# Altium PCB PCB1.PcbDoc
Units mil, origin at the board's own origin, x right, y up, seen from the top; angles counter-clockwise.
Board outline 8212 x 7884 mil, 2 copper layers (Top Layer, Bottom Layer); 18 components, 44 nets, 114 pads, 0 vias.
Unrouted connection lines stored in the file: 10.
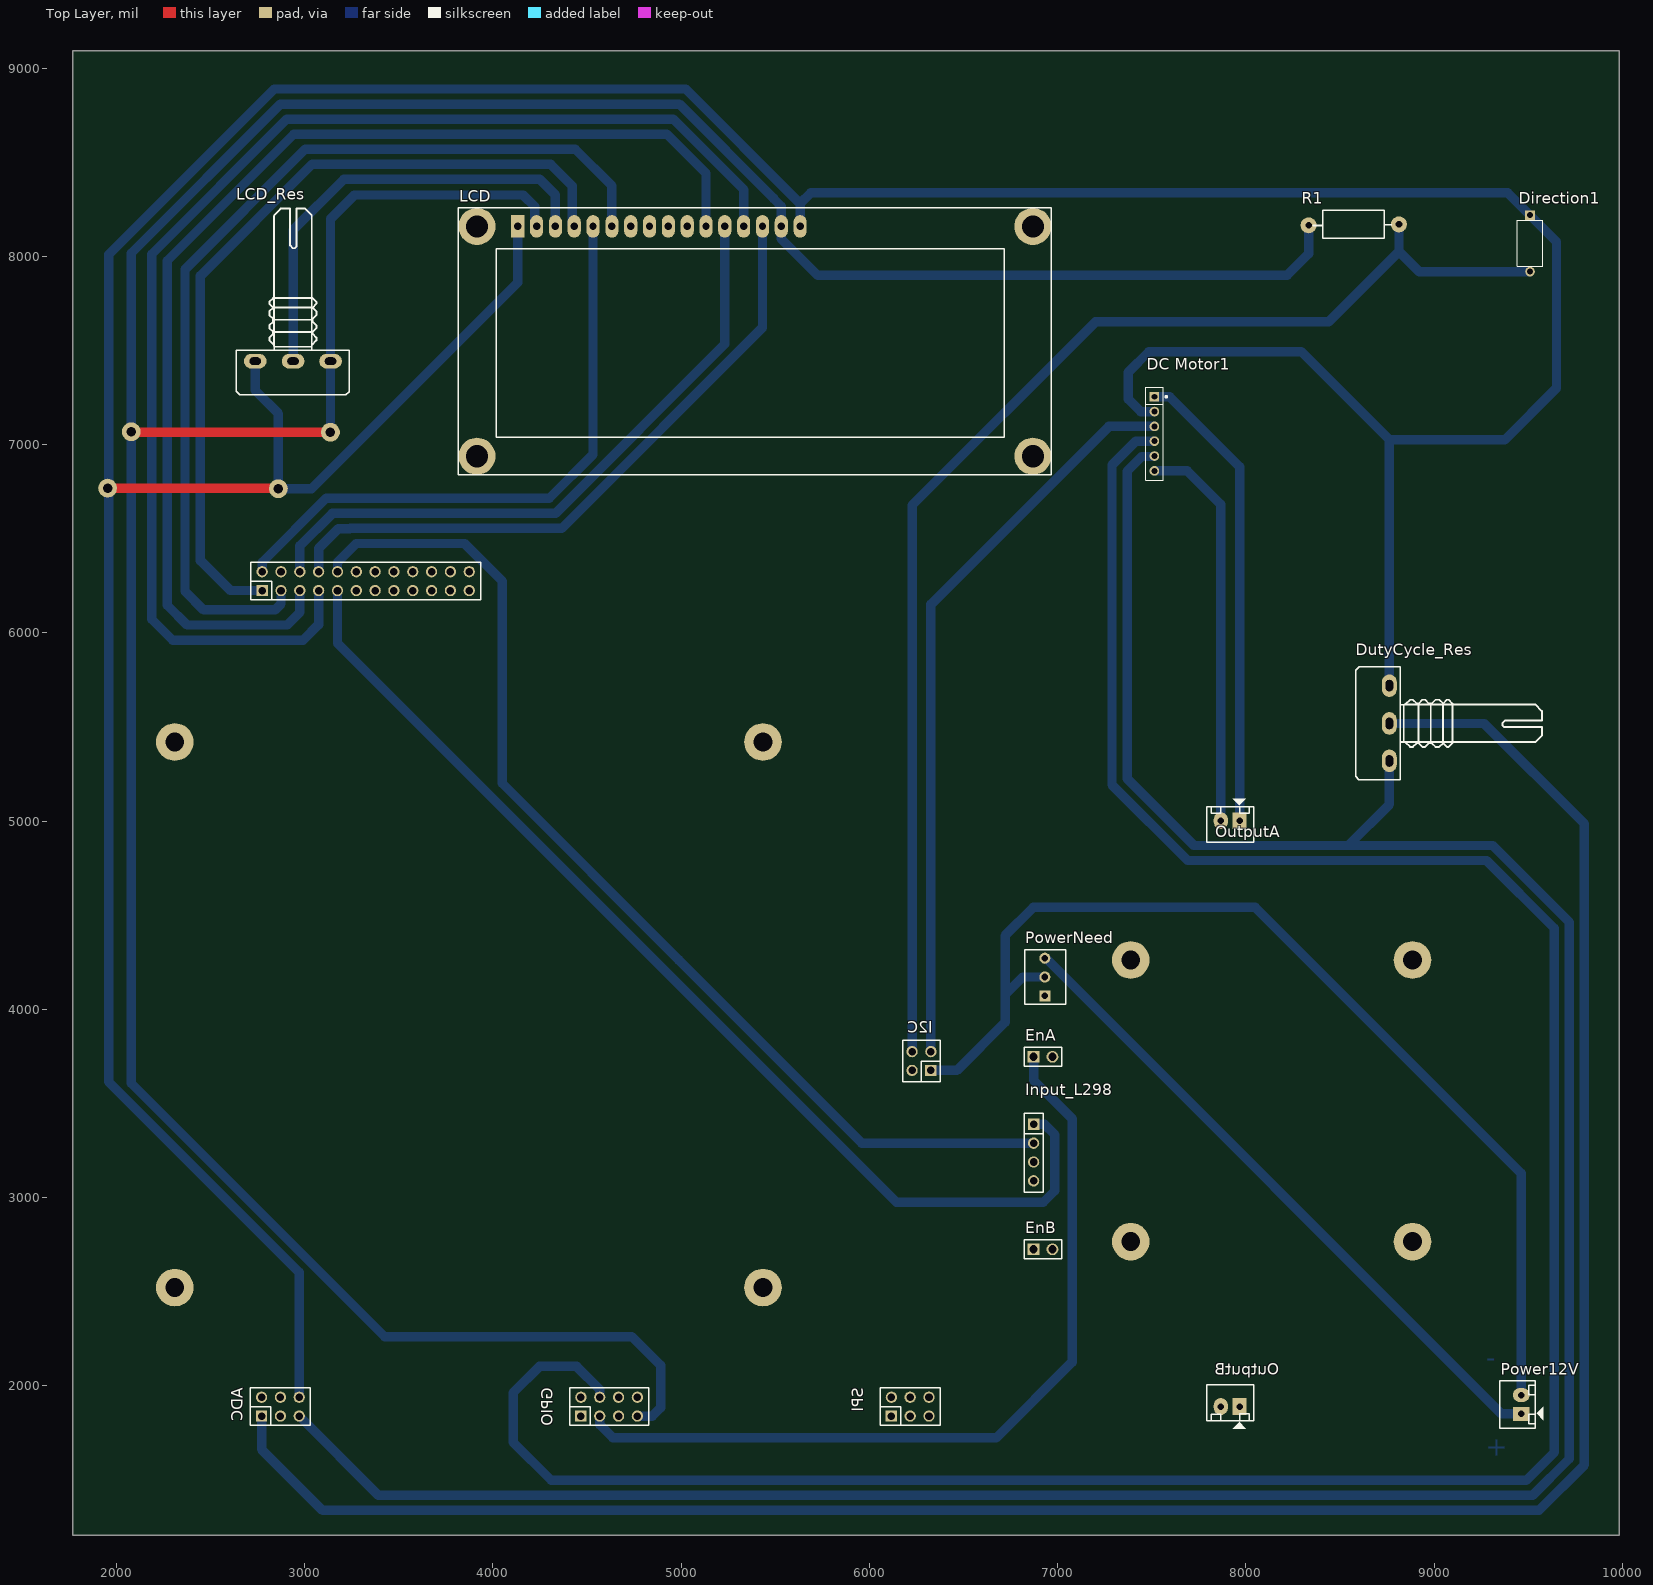
[diagram p0: Top Layer view]
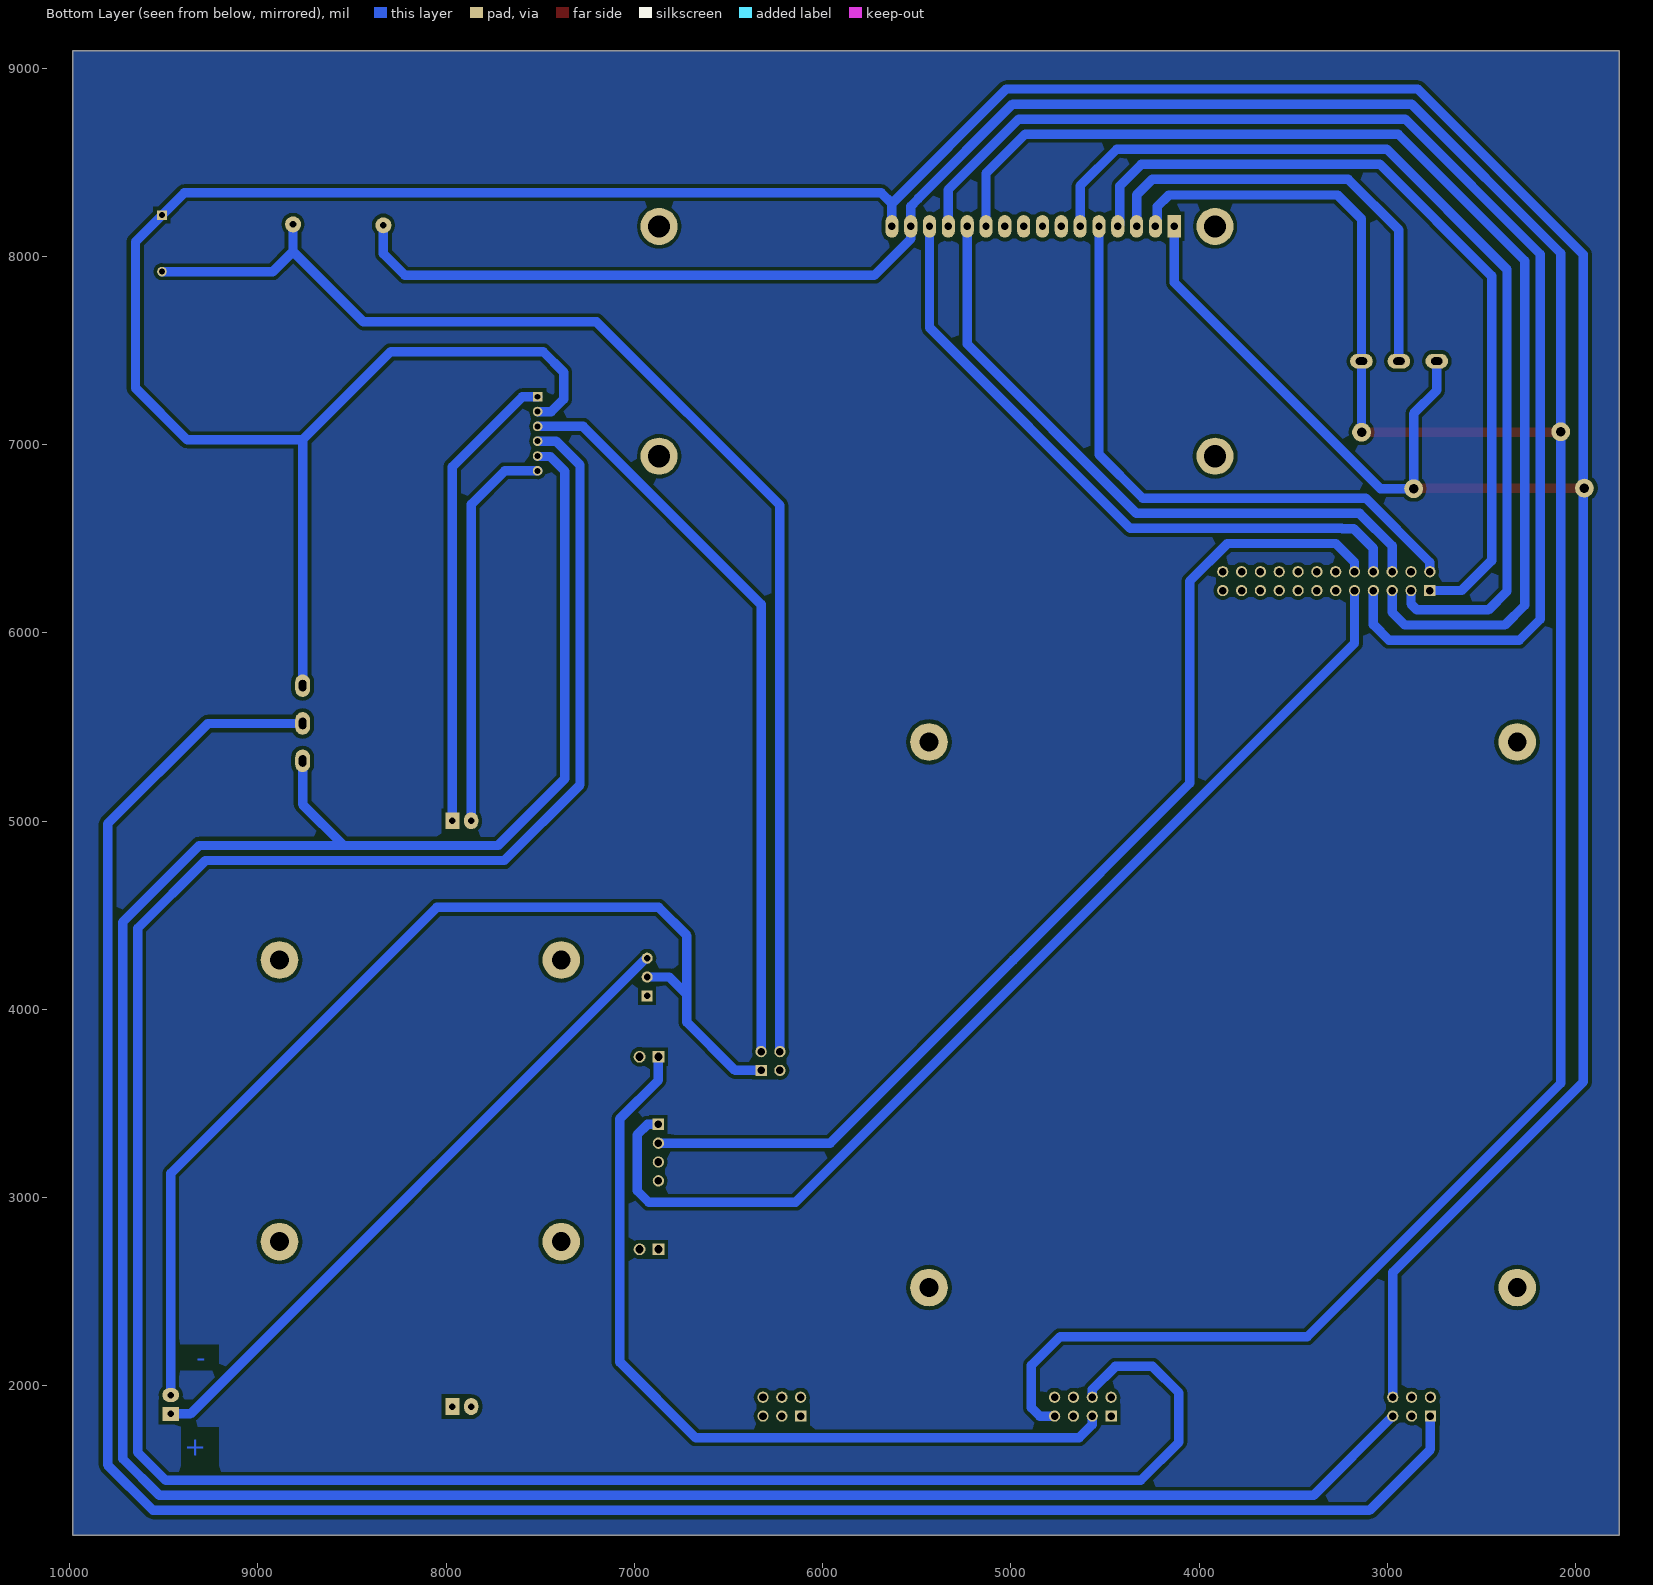
[diagram p1: Bottom Layer view, seen from below]
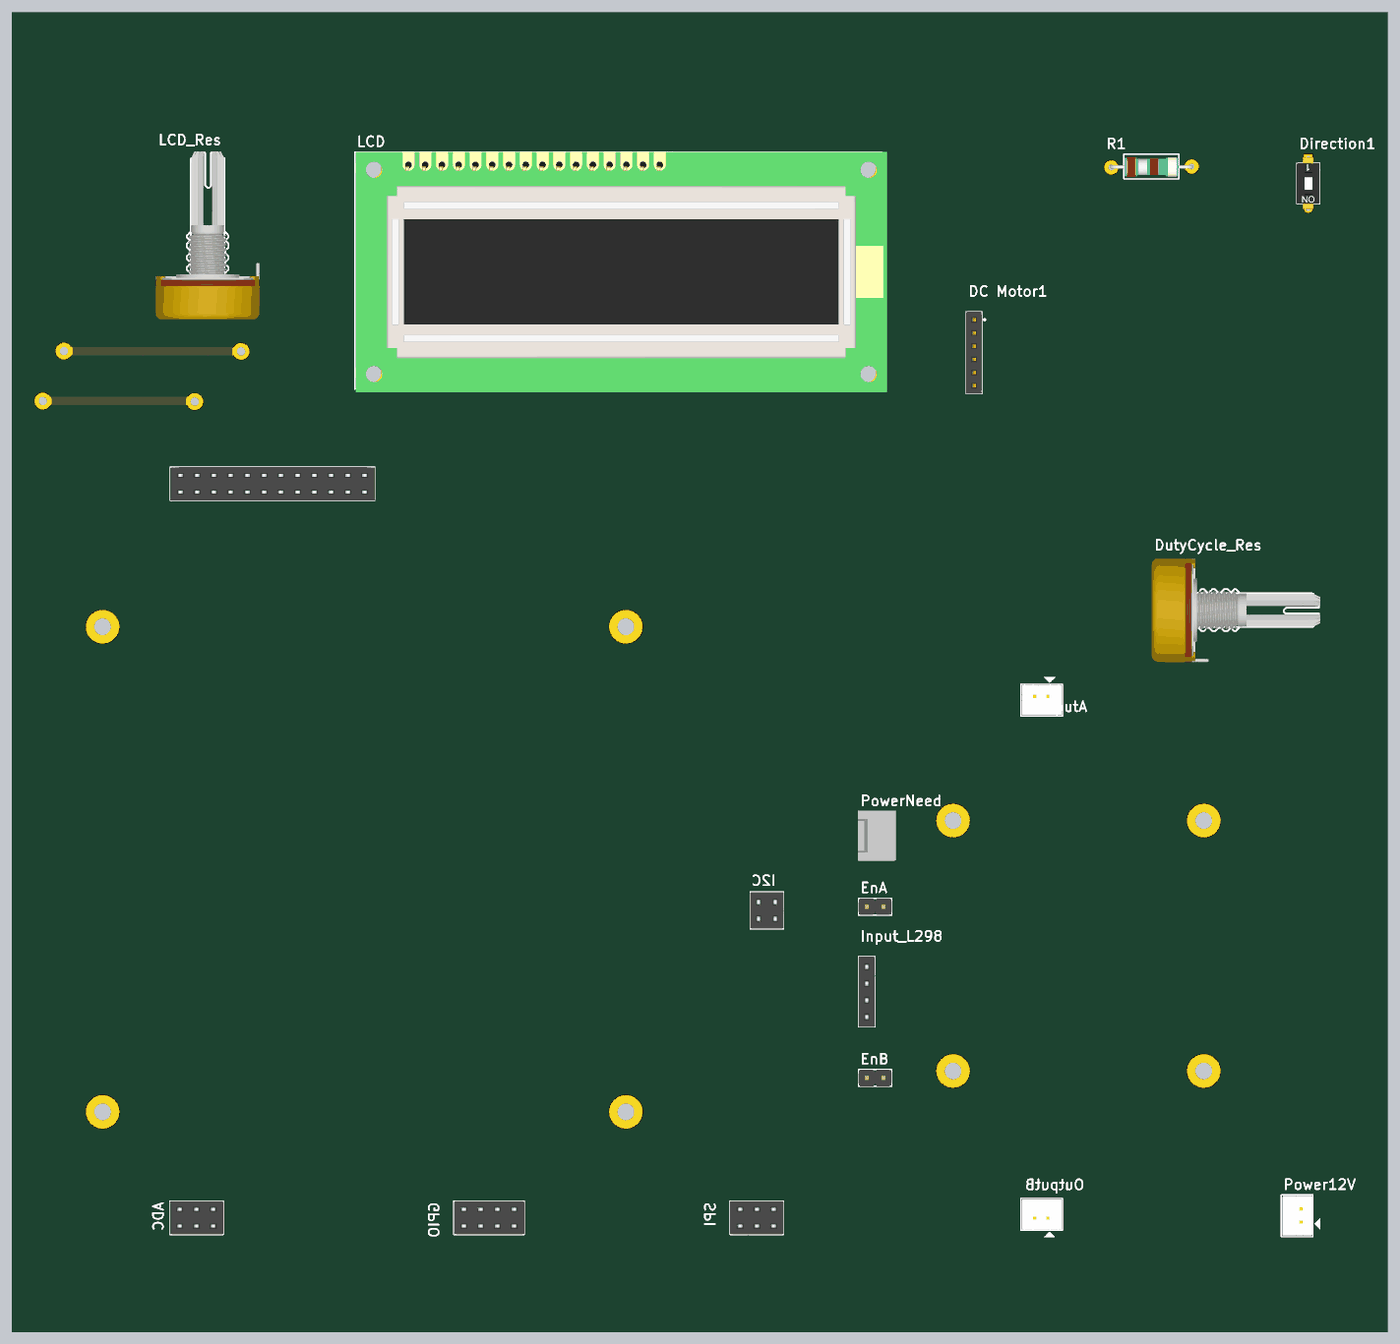
[diagram p2: 3D render of the assembled board from above, using the file's embedded part models]

## Layer stack, top to bottom
Top Solder: solder mask 0.4, Solder Resist, Dk 3.5
Top Layer: signal copper 1.4
Dielectric 1: dielectric 12.6, FR-4, Dk 4.8
Bottom Layer: signal copper 1.4
Bottom Solder: solder mask 0.4, Solder Resist, Dk 3.5

## Board outline
1770,1207 9982,1207 9982,9091 1770,9091

## Design rules (kind name [scope] priority, off if disabled: settings)
Clearance [All] p1: gap=20
PolygonConnect [All] p1: connectstyle=Relief reliefconductorwidth=10 reliefentries=4 polygonreliefangle="90 Angle" airgapwidth=10
RoutingLayers [All] p1: top layer_v5=FALSE bottom layer_v5=TRUE
RoutingVias [All] p1: holewidth=50 width=100 viastyle="Through Hole" minholewidth=50 minwidth=100 maxholewidth=50 maxwidth=100
SolderMaskExpansion [All] p1: expansion=4
Width [All] p1: maxlimit=50 minlimit=50 preferedwidth=50
29 further rules are at their usual default settings.

## Classes and differential pairs
component class Sheet1: ADC "DC Motor1" Direction1 DutyCycle_Res EnA EnB GPIO I2C Input_L298 LCD LCD_Res OutputA OutputB Power12V PowerNeed R1 SPI

## Components (designator, comment, footprint, x,y, rotation, side; value= is the part's Value field where it differs from the comment)
ADC "" JP3-C2T 2871.83,1890.15 r0 top
"DC Motor1" "" J6-C1T 7514.1,7057.56 r270 top
Direction1 "Button" SW-DIP1 9509.21,8068.83 r180 top
DutyCycle_Res "10K" VR-S1 8762.1,5520 r90 top
EnA "" JP2-D1T 6872.7,3748.7 r0 top
EnB "" JP2-D1T 6872.7,2725.98 r0 top
EXT.Memory "" JP12-C2T 3325,6275 r0 top
GPIO "" JP4-C2T 4617.83,1890.15 r0 top
I2C "" JP2-C2T 6276.83,3726 r90 top
Input_L298 "" JP4-C1T 6872.7,3389.7 r270 top
LCD "" LCD16X2 4132.39,8159 r0 top
LCD_Res "10K" VR-S1 2938.1,7443.31 r180 top
OutputA "" Header2 7966.72,5002.15 r180 top
OutputB "" Header2 7966.72,1890.71 r180 top
Power12V "" Header2 9462.71,1851.71 r90 top
PowerNeed "" HDR3 6932.15,4072.13 r90 top
R1 "4k7" RES-1/2W 8553.1,8169.93 r0 top
SPI "" JP3-C2T 6216.98,1890.15 r0 top

## Footprints (in the part's own frame and the unit in brackets; to place one, negate y for a bottom-side part, rotate by r counter-clockwise, add the part's x,y. Pads: shape width x height; smd on the part's side, far side on the other; paste and mask are expansions set on the pad)
HDR3 [mm] "Connector; Header; 3 Position"
  rect 1.5x1.5 hole 0.9: 1(0,0)
  round 1.5 hole 0.9: 2(2.54,0) 3(5.08,0)
  silkscreen extent -1.14,-2.79 6.22,2.74, body extent -1.27,-2.92 6.35,2.88, height 11.72
Header2 [mil] "CON2"
  rect 75x90 hole 34: 1(0,0)
  oval 75x90 hole 34: 2(100,0)
  silkscreen extent -75,-118 175,115, body extent -68,-70 168,107, height 236
J6-C1T [mm] "6p, 1 row, straight, gold plating"
  rect 1.3x1.3 hole 0.8: 1(-5,0)
  round 1.3 hole 0.8: 2(-3,0) 3(-1,0) 4(1,0) 5(3,0) 6(5,0)
  silkscreen extent -6.25,-1.2 6.25,1.71, body extent -6.25,-1.2 6.25,1.2, height 4.31
JP2-C2T [mm] "4 pins, dual row, straight, gold plating"
  rect 1.52x1.52 hole 1.02: 1(-1.27,-1.27)
  round 1.52 hole 1.02: 2(1.27,-1.27) 3(1.27,1.27) 4(-1.27,1.27)
  silkscreen extent -2.79,-2.54 2.79,2.54, body extent -2.79,-2.54 2.79,2.54, height 8.51
JP2-D1T [mm] "2 pins, 1 row, straight, gold plating"
  rect 1.6x1.6 hole 1.1: 1(0,0)
  round 1.6 hole 1.1: 2(2.54,0)
  silkscreen extent -1.27,-1.27 3.81,1.27, body extent -1.27,-1.27 3.81,1.27, height 8.54
JP3-C2T [mm] "6 pins, dual row, straight, gold plating"
  rect 1.52x1.52 hole 1.02: 1(-2.54,-1.27)
  round 1.52 hole 1.02: 2(0,-1.27) 3(2.54,-1.27) 4(2.54,1.27) 5(0,1.27) 6(-2.54,1.27)
  silkscreen extent -4.06,-2.54 4.06,2.54, body extent -4.06,-2.54 4.06,2.54, height 8.51
JP4-C1T [mm] "4 row, straight, gold plating"
  rect 1.52x1.52 hole 1.02: 1(0,0)
  round 1.52 hole 1.02: 2(2.54,0) 3(5.08,0) 4(7.62,0)
  silkscreen extent -1.52,-1.27 9.14,1.27, body extent -1.52,-1.25 9.14,1.25, height 8.51
JP4-C2T [mm] "8 pins, dual row, straight, gold plating"
  rect 1.52x1.52 hole 1.02: 1(-3.81,-1.27)
  round 1.52 hole 1.02: 2(-1.27,-1.27) 3(1.27,-1.27) 4(3.81,-1.27) 5(3.81,1.27) 6(1.27,1.27) 7(-1.27,1.27) 8(-3.81,1.27)
  silkscreen extent -5.33,-2.54 5.33,2.54, body extent -5.33,-2.54 5.33,2.54, height 8.51
JP12-C2T [mm] "24 pins, dual row, straight, gold plating"
  rect 1.52x1.52 hole 1.02: 1(-13.97,-1.27)
  round 1.52 hole 1.02: 2(-11.43,-1.27) 3(-8.89,-1.27) 4(-6.35,-1.27) 5(-3.81,-1.27) 6(-1.27,-1.27) 7(1.27,-1.27) 8(3.81,-1.27) 9(6.35,-1.27) 10(8.89,-1.27) 11(11.43,-1.27) 12(13.97,-1.27) 13(13.97,1.27) 14(11.43,1.27) 15(8.89,1.27) 16(6.35,1.27) 17(3.81,1.27) 18(1.27,1.27) 19(-1.27,1.27) 20(-3.81,1.27) 21(-6.35,1.27) 22(-8.89,1.27) 23(-11.43,1.27) 24(-13.97,1.27)
  silkscreen extent -15.49,-2.54 15.49,2.54, body extent -15.49,-2.54 15.49,2.54, height 8.51
LCD16X2 [mm] "LCD dipslay 16x2, 16 pin"
  round 5 hole 3: 1(-5.5,-31) 1(-5.5,0) 1(69.5,-31) 1(69.5,0)
  rect 1.778x3.048 hole 1: 1(0,0)
  oval 1.778x3.048 hole 1: 2(2.54,0) 3(5.08,0) 4(7.62,0) 5(10.16,0) 6(12.7,0) 7(15.24,0) 8(17.78,0) 9(20.32,0) 10(22.86,0) 11(25.4,0) 12(27.94,0) 13(30.48,0) 14(33.02,0) 15(35.56,0) 16(38.1,0)
  round 0 all layers, no hole: ""(-5.5,0)
  silkscreen extent -8,-33.5 72,2.5, body extent -7.87,-33.96 72.64,2.54, height 18.14
RES-1/2W [mil]
  round 85 hole 35: 1(-220,-5) 2(260,0)
  silkscreen extent -195,-74 221,75, body extent -230,-60 270,56, height 121
SW-DIP1 [mm]
  rect 1.3x1.3 hole 0.8: 1(0,-3.81)
  round 1.3 hole 0.8: 2(0,3.81)
  silkscreen extent -1.74,-3.1 1.74,3.1, body extent -1.74,-3.98 1.74,3.89, height 3.95
VR-S1 [mil]
  oval 120x78.74 hole 40 slot 60 at 0 deg: 1(-200,0) 2(-1,0) 3(200,0)
  silkscreen extent -299,-810 300,179, body extent -310,-818 310,188, height 839

## Part data
ADC SPI: library part JP3x2, "WR-PHD 2.54 mm Dual Socket Header"
"DC Motor1": library part JP6x1-2.0, "WR-PHD 2.00 mm Socket Header"
Direction1: library part SW2, "Switch button 2 pin"
DutyCycle_Res LCD_Res: library part VR-S, "Var Resistor"
EnA EnB: library part JP2, "WR-PHD 2.54 mm Angled Socket Header"
EXT.Memory: library part JP12x2, "WR-PHD 2.54 mm Dual Socket Header"
GPIO: library part JP4x2, "WR-PHD 2.54 mm Dual Socket Header"
I2C: library part JP2x2, "WR-PHD 2.54 mm Dual Socket Header"
Input_L298: library part JP4, "WR-PHD 2.54 mm Angled Socket Header"
LCD: library part LCD16x2A, "LCD dipslay 16 char, 2 line"
OutputA OutputB Power12V: library part Header2, "Header IDC, 2 x 1 Pin Vertical 2.54mm Pitch (Non-Boxed, Male)"
PowerNeed: library part Header3, "Header IDC, 3 x 1 Pin Vertical 2.54mm Pitch (Non-Boxed, Male)"
R1: library part Res, "Res"

## Free pads (board coordinates)
  round 100 hole 50: 0(1954,6769) 0(2861,6766) 0(3137.55,7066) 1(2080,7068)
  round 200 hole 100: 3(2311,2522.71) 3(2311,5420.71) 3(5435.11,2522.71) 3(5435.11,5420.71) 3(7388.43,2766.7) 3(7388.43,4262.71) 3(8885.15,2766.7) 3(8885.15,4262.71)

## Nets (pads, with @x,y where several pads share a name; then routed paths per layer and width w, separated by ;. In a path a pad name is that pad's centre, name@x,y a point inside that pad or via, vN(x,y) a via of type N, cw(c..) or ccw(c..) an arc to the next point about the centre after c; other vN are vias at no path point)
12V+: Power12V.1 PowerNeed.3 | length 3533.1
  Bottom Layer w50: PowerNeed.3 6937.55,4272.13 9357.96,1851.71 Power12V.1
"DC SUPPLY +": "DC Motor1.1" OutputA.1 | length 2486.9
  Bottom Layer w50: 7514.1,7254.41 7594.59,7254.41 7966.72,6882.28 OutputA.1
"DC SUPPLY -": "DC Motor1.6" OutputA.2 | length 2106.7
  Bottom Layer w50: 7514.1,6860.71 7688.29,6860.71 7866.72,6682.28 OutputA.2
ENA2: EnA.2
GND: "DC Motor1.2" ADC.4 Direction1.1 DutyCycle_Res.3 GPIO.5 I2C.1 LCD.1 LCD.16 LCD_Res.3 pad.0@1954,6769 pad.0@2861,6766 Power12V.2 PowerNeed.2 SPI.4 | length 29494.5
  Top Layer w50: pad.0@1954,6769 pad.0@2853.55,6769
  Bottom Layer w50: LCD_Res.3 2738.1,7287.9 2861,7165 2861,6766 3037,6766 4132.39,7861.39 LCD.1@4132.39,8159 ; ADC.4 2971.83,2603.17 1960,3615 1960,8010 2839,8889 5024.41,8889 5632.39,8281.02 ; LCD.16 5632.39,8281.02 ; I2C.1 6465,3676 6721,3932 6721,4078 ; PowerNeed.2 6815.13,4172.13 6721,4078 ; 7514.1,7175.67 7441.33,7175.67 7376,7241 7376,7385 7484,7493 8295,7493 8762.1,7025.9 ; DutyCycle_Res.3 8762.1,7025.9 ; Power12V.2 9462.71,3129.29 8050,4542 6871,4542 6721,4392 6721,4078 ; 5632.39,8281.02 5689.38,8338 9390.04,8338 Direction1.1 9650,8078.04 9650,7300 9375.9,7025.9 8762.1,7025.9
INPUT3: Input_L298.3
INPUT4: Input_L298.4
NetLCD_3: LCD.3 LCD_Res.2 | length 2403.2
  Bottom Layer w50: LCD_Res.2 2939.1,8140.1 3208,8409 4250,8409 4332.39,8326.61 LCD.3
PA0/AD0: EXT.Memory.1 LCD.4 | length 4393.4
  Bottom Layer w50: EXT.Memory.1 2606,6225 2447,6384 2447,7896 3040,8489 4307,8489 4422.39,8373.61 4422.39,8169 LCD.4
PA1/AD1: EXT.Memory.24 LCD.5 | length 3256.1
  Bottom Layer w50: EXT.Memory.24 2775,6375.27 3114.73,6715 4299.73,6715 4532.39,6947.67 LCD.5
PA2/AD2: EXT.Memory.2 LCD.6 | length 5173
  Bottom Layer w50: EXT.Memory.2 2875,6154 2843,6122 2464,6122 2365,6221 2365,7930.86 3003.14,8569 4438,8569 4632.39,8374.61 LCD.6
PA3/AD3: EXT.Memory.23
PA4/AD4: EXT.Memory.3 LCD.11 | length 6229.5
  Bottom Layer w50: EXT.Memory.3 2975,6109 2908,6042 2376,6042 2271,6147 2271,7977 2943,8649 4925,8649 5132.39,8441.61 LCD.11
PA5/AD5: EXT.Memory.22 LCD.12 | length 3463.2
  Bottom Layer w50: EXT.Memory.22 2975,6462.14 3147.86,6635 4332.86,6635 5232.39,7534.53 LCD.12
PA6/AD6: EXT.Memory.4 LCD.13 | length 6879.8
  Bottom Layer w50: EXT.Memory.4 3075,6044 2992,5961 2300,5961 2188,6073 2188,8011.73 2905.27,8729 4958.14,8729 5332.39,8354.74 LCD.13
PA7/AD7: EXT.Memory.21 LCD.14 | length 3504.6
  Bottom Layer w50: EXT.Memory.21 3075,6449 3180,6554 3240.86,6554 3241.86,6555 4366,6555 5432.39,7621.39 LCD.14
PB0: SPI.1
PB1: SPI.6
PB2: SPI.2
PB3: SPI.5
PC0: EXT.Memory.5 Input_L298.1 | length 5763.8
  Bottom Layer w50: EXT.Memory.5 3175,5945.21 6144.21,2976 6160.97,2976 ; 6175.11,2976 6924,2976 6985,3037 6985,3335 6930.3,3389.7 Input_L298.1
PC1: EXT.Memory.20 Input_L298.2 | length 5738.2
  Bottom Layer w50: EXT.Memory.20 3175,6375 3275,6475 3850,6475 4050,6275 4050,5201.27 4987.86,4263.41 4987.86,4262.24 5960.4,3289.7 Input_L298.2
PC2: EXT.Memory.6
PC3: EXT.Memory.19
PC4: EXT.Memory.7
PC5: EXT.Memory.18
PC6: EXT.Memory.8
PC7: EXT.Memory.17
PD0: Direction1.2 I2C.3 R1.2 | length 6931
  Bottom Layer w50: I2C.3 6226.83,6677.83 7201,7652 8439.21,7652 8813.1,8025.9 ; R1.2 8813.1,8025.9 ; Direction1.2 8920.17,7918.83 8813.1,8025.9
PD1: "DC Motor1.3" I2C.2 | length 3954.3
  Bottom Layer w50: I2C.2 6326.83,6151.28 7272.48,7096.93 7514.1,7096.93
PE2: GPIO.1
PE3: GPIO.8
PE4: EnA.1 GPIO.2 | length 4456.1
  Bottom Layer w50: GPIO.2 4567.83,1795.17 4638,1725 6675,1725 7077,2127 7077,3420 6872.7,3624.3 EnA.1
PE5: "DC Motor1.4" GPIO.7 | length 13972.1
  Bottom Layer w50: GPIO.7 4567.83,1981.17 4445,2104 4248,2104 4108,1964 4108,1701 4310,1499 9489.86,1499 9638,1647.14 9638,4430.86 9277.86,4791 7690.86,4791 7289,5192.86 7289,6892 7413.93,7016.93 7514.1,7016.93
PE6: GPIO.3
PE7: GPIO.6
PF0/ADC0: ADC.1 DutyCycle_Res.2 | length 12099
  Bottom Layer w50: ADC.1 2771.83,1663.17 3096,1339 9557.07,1339 ; DutyCycle_Res.2 9265,5519 9798,4986 9798,1580.86 9557.07,1339.93
PF1/ADC1: ADC.6
PF2/ADC2: ADC.2
PF3/ADC3: ADC.5
PG0: EXT.Memory.9
PG1: EXT.Memory.16
PG2: EXT.Memory.10
VCC: "DC Motor1.5" ADC.3 DutyCycle_Res.1 GPIO.4 I2C.4 LCD.2 LCD.15 LCD_Res.1 pad.0@3137.55,7066 pad.1 R1.1 SPI.3 | length 33790.7
  Top Layer w50: pad.1@2084,7066 pad.0@3137.55,7066
  Bottom Layer w50: ADC.3 3392.98,1419 9523,1419 9718,1614 9718,4464 9311,4871 8544,4871 ; pad.0@3137.55,7066 3138.1,7066.55 LCD_Res.1 3138.1,8199.1 3265,8326 4161,8326 4222.39,8264.61 4222.39,8169.02 LCD.2 ; GPIO.4 4847.15,1840.15 4891,1884 4891,2110 4739,2262 3426.14,2262 2080,3608.14 2080,8016.86 2872.14,8809 4991.27,8809 5492.29,8307.98 5492.29,8305.57 5532.39,8265.47 LCD.15 5532.39,8092.61 5725,7900 8219,7900 8333.1,8014.1 R1.1 ; 7514.1,6936.93 7447.06,6936.93 7369,6858.86 7369,5226 7724,4871 8544,4871 ; DutyCycle_Res.1 8762.1,5089.1 8544,4871
pads on no net: EnB.1 EnB.2 EXT.Memory.11 EXT.Memory.12 EXT.Memory.13 EXT.Memory.14 EXT.Memory.15 LCD. LCD.7 LCD.8 LCD.9 LCD.10 OutputB.1 OutputB.2 PowerNeed.1

## Polygon pours and split planes (outlines as drawn)
no net on Bottom Layer "Mechanical 1-No Net" (solid, pour order 5): 1770,9091 9982,9091 9982,1207 1770,1207

## Other copper
Bottom Layer:
  text "-" at 9276,2101 h100
  text "+" at 9274,1629 h100

## Silkscreen, mask and mechanical layers (free items; w line width, h text height)
Mechanical 1:
  the board outline again, w100